# Altium PCB SolarSenseMaster.PcbDoc
Units mm, origin at the board's own origin, x right, y up, seen from the top; angles counter-clockwise.
Board outline 70 x 100 mm, 2 copper layers (Top Layer, Bottom Layer); 62 components, 47 nets, 219 pads, 103 vias.
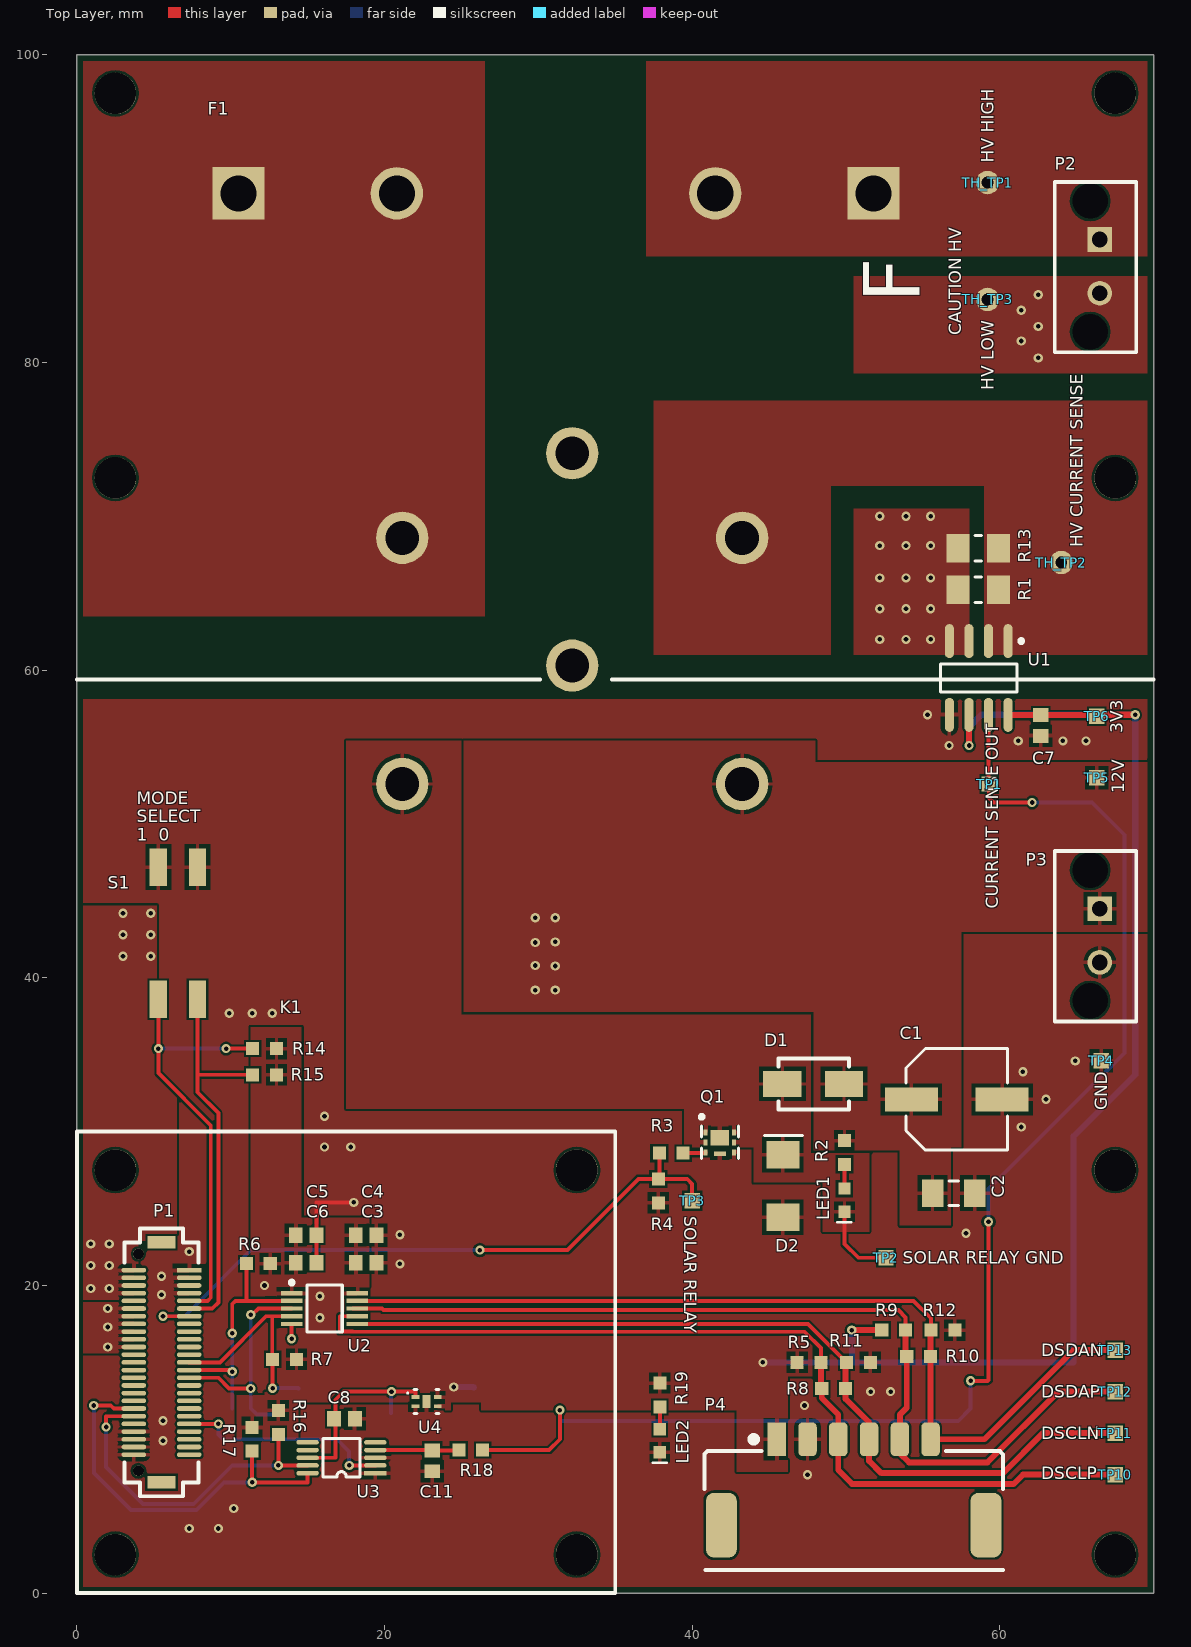
[diagram p0: Top Layer view]
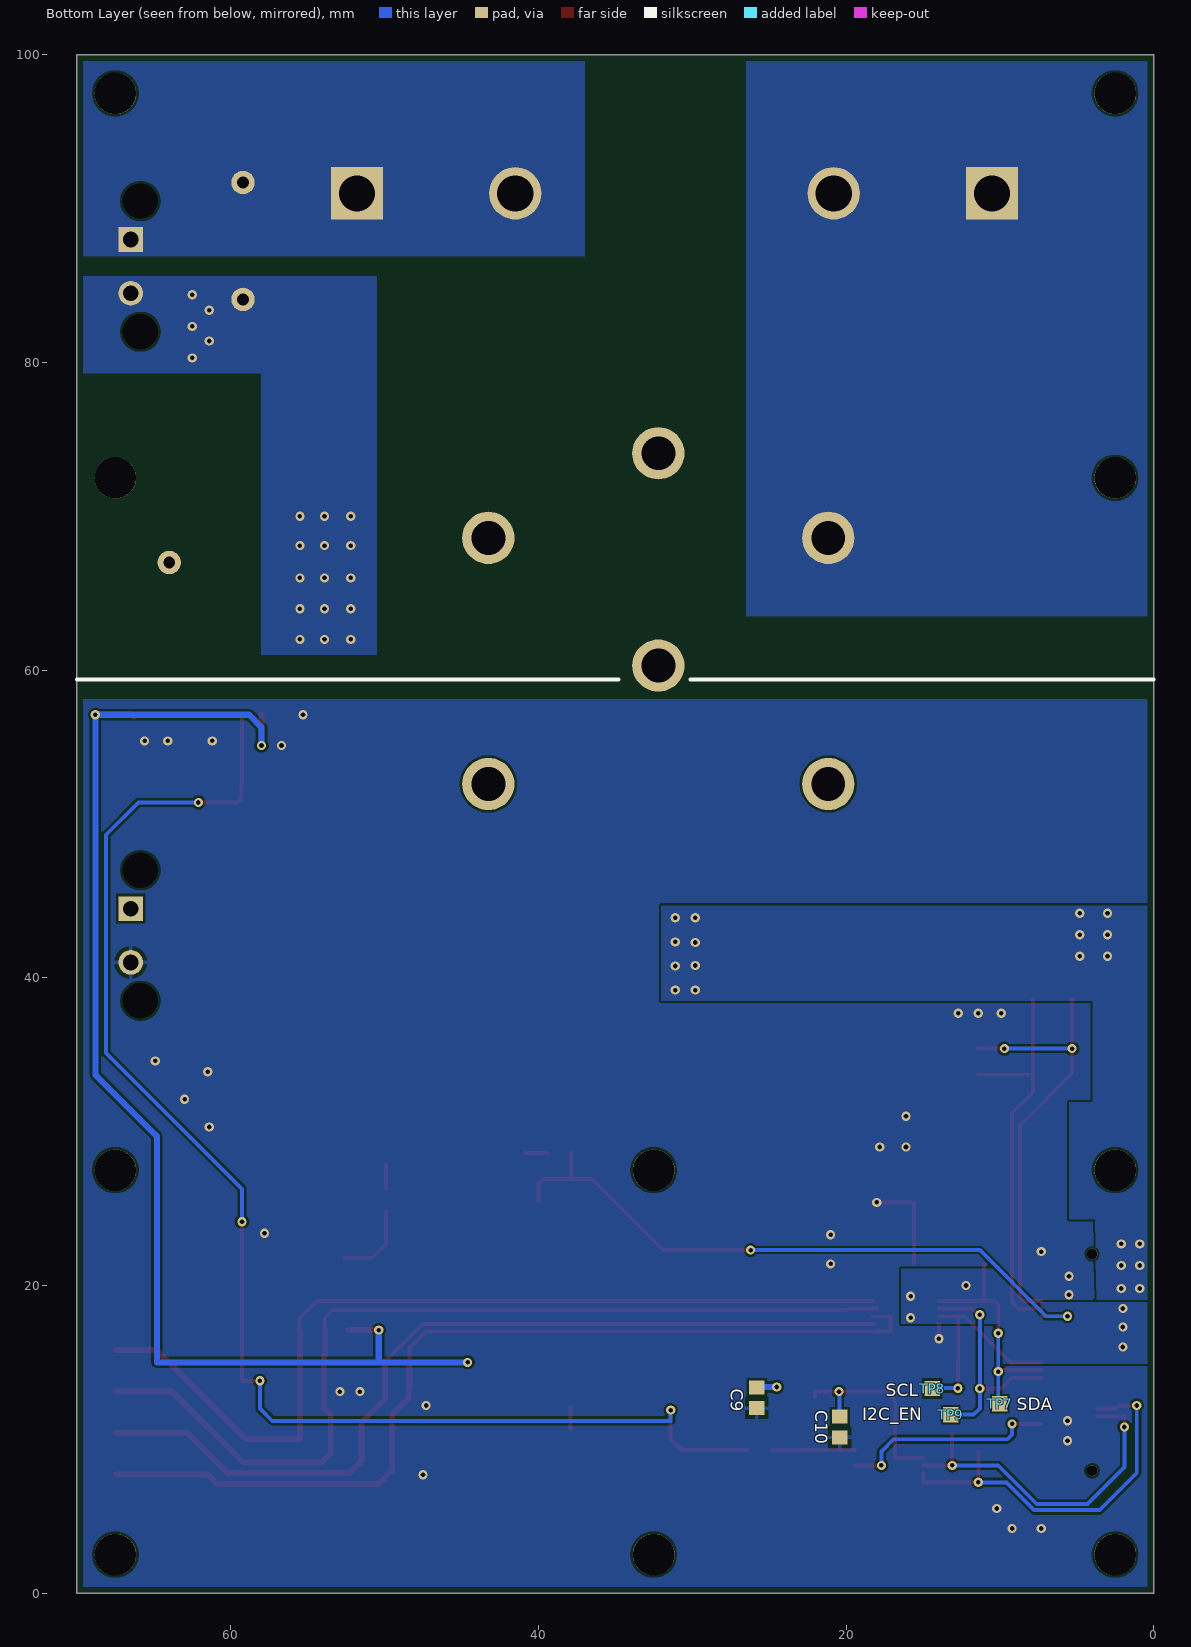
[diagram p1: Bottom Layer view, seen from below]
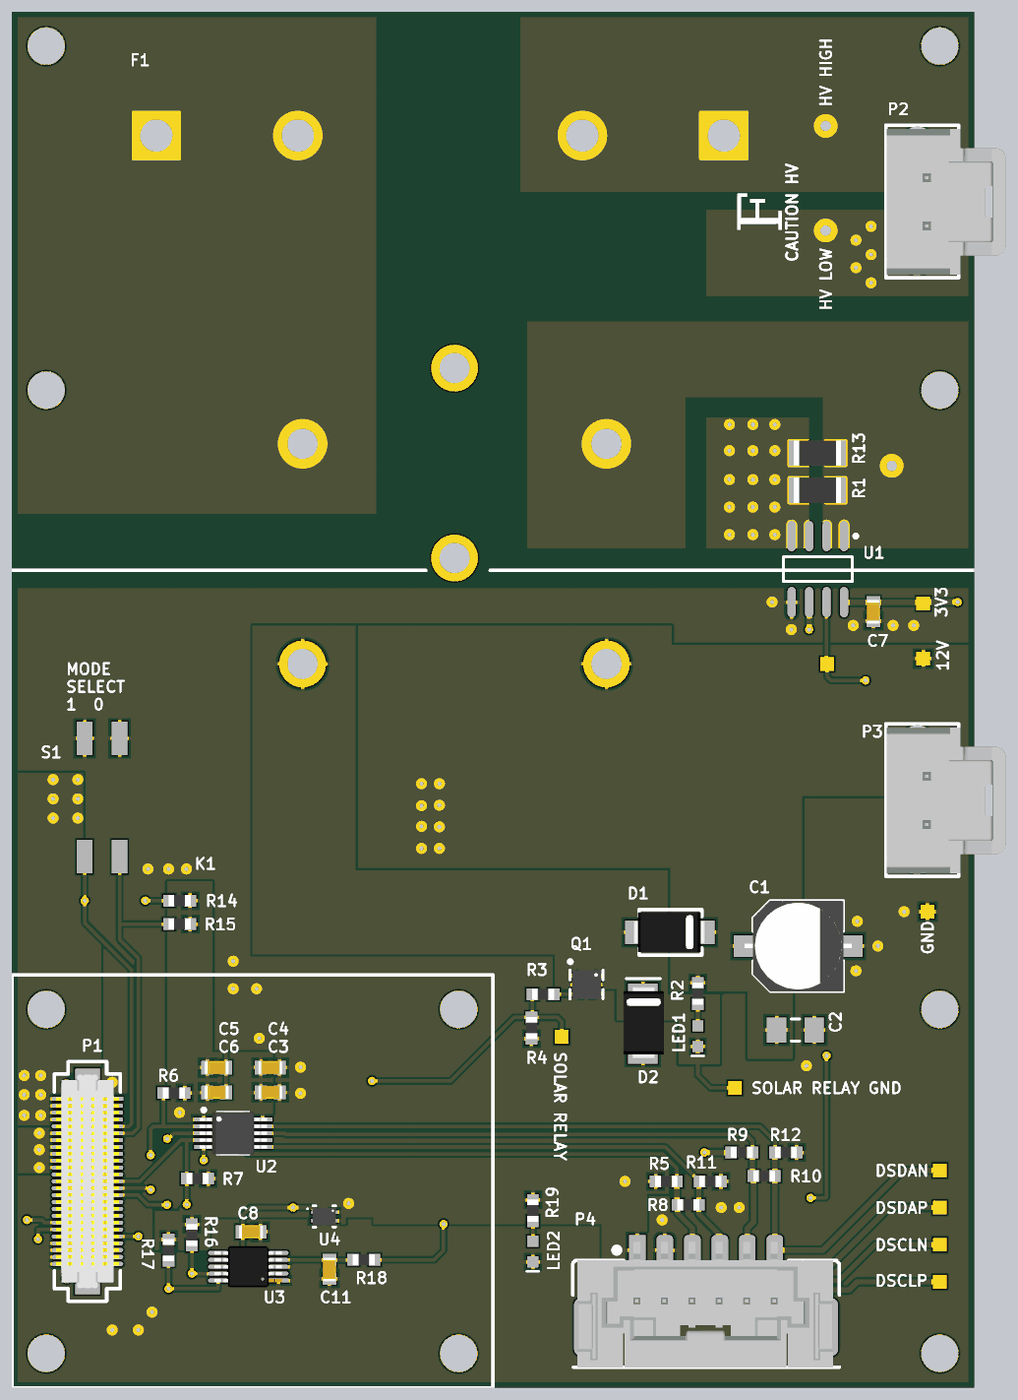
[diagram p2: 3D render of the assembled board from above, using the file's embedded part models]

## Layer stack, top to bottom
Top Solder: solder mask 0.0102, Solder Resist, Dk 3.5
Top Layer: signal copper 0.0356
Dielectric 1: dielectric 0.32, FR-4, Dk 4.8
Bottom Layer: signal copper 0.0356
Bottom Solder: solder mask 0.0102, Solder Resist, Dk 3.5

## Board outline
0,0 0,100 70,100 70,0

## Design rules (kind name [scope] priority, off if disabled: settings)
BoardOutlineClearance [All] p1: gap=0.406 ignorepadtopadclearanceinfootprint=FALSE
Clearance [All] p1: gap=0.152 ignorepadtopadclearanceinfootprint=FALSE except(0: Arc-Hole Track-Hole SMDPad-Hole THPad-Hole Via-Hole Fill-Hole Poly-Hole Region-Hole Text-Hole)
ComponentClearance ComponentClearance_ControllerBoard [InComponent('P1') vs Identifier = 'Controller_Board'] p1: gap=0 collisioncheckmode=3 verticalgap=0 showdistances=FALSE
ComponentClearance ComponentClearance_Standoffs [Identifier = 'Standoff' vs Identifier = 'Controller_Board'] p2: gap=0 collisioncheckmode=3 verticalgap=0 showdistances=FALSE
ComponentClearance [All] p3: gap=0.254 collisioncheckmode=3 verticalgap=0.254 showdistances=FALSE
DiffPairsRouting [All] p1: maxlimit=0.254 minlimit=0.254 mostfreqgap=0.254 toplayer_minwidth=0.254 toplayer_maxwidth=0.381 toplayer_prefwidth=0.254 bottomlayer_minwidth=0.254 bottomlayer_maxwidth=0.381 bottomlayer_prefwidth=0.254 maxuncoupledlength=12.7
Height Relay_Height [InComponent('K1') OR InComponent('K2')] p1: minheight=0 maxheight=70 prefheight=12.7
Height [All] p2: minheight=0 maxheight=25.4 prefheight=12.7
HoleSize [All] p1: absolutevalues=TRUE maxlimit=6.3 minlimit=0.3 maxpercent=80.000 minpercent=20.000
MinimumAnnularRing [All] p1: minimumring=0.15
MinimumSolderMaskSliver [All] p1: minsoldermaskwidth=0.3
PolygonConnect PolygonConnect_10A [All vs InNetClass('10A')] p1: connectstyle=Direct reliefconductorwidth=0.254 reliefentries=4 polygonreliefangle="90 Angle" airgapwidth=0.254
PolygonConnect [IsPad] p2: connectstyle=Relief reliefconductorwidth=0.254 reliefentries=4 polygonreliefangle="90 Angle" airgapwidth=0.254
PolygonConnect PolygonConnect_NoThermal [Not(IsPad)] p3: connectstyle=Direct reliefconductorwidth=0.254 reliefentries=4 polygonreliefangle="90 Angle" airgapwidth=0.254
RoutingVias [All] p1: holewidth=0.3 width=0.6 viastyle="Through Hole" minholewidth=0.3 minwidth=0.6 maxholewidth=0.711 maxwidth=1.27
SilkToSolderMaskClearance [IsPad] p1: minsilkscreentomaskgap=0.178 clearancetoexposedcopper=TRUE
SolderMaskExpansion [All] p1: expansion=0.102
Width Width_3V3 [InNet('3V3')] p1: maxlimit=0.4 minlimit=0.254 preferedwidth=0.4
Width [All] p2: maxlimit=2.54 minlimit=0.152 preferedwidth=0.254
24 further rules are at their usual default settings.

## Classes and differential pairs
component class SolarSenseMaster: C1 C2 C7 D1 D2 F1 K1 LED1 LED2 P2 P3 Q1 R1 R2 R3 R4 R13 R14 R15 R19 S1 TH_TP1 TH_TP2 TH_TP3 TP1 TP2 TP3 TP4 TP5 TP6 U1
component class I2C_Interface: C3 C4 C5 C6 C8 C9 C10 C11 P4 R5 R6 R7 R8 R9 R10 R11 R12 R16 R17 R18 TP7 TP8 TP9 TP10 TP11 TP12 TP13 U2 U3 U4
component class Controller_Board_Interface: P1
net class 10A: HV_HIGH HV_LOW NetF1_2 NetK1_4
differential pair DSCL: +DSCL_P -DSCL_N
differential pair DSDA: +DSDA_P -DSDA_N

## Components (designator, comment, footprint, x,y, rotation, side; value= is the part's Value field where it differs from the comment)
C1 "EEE-1HA4R7NP" "CAP ALUM 6.3MM RADIAL SMD" 57.2,32.1 r0 top
C2 "CAP CER 2.2UF 100V ±20% X7R 1206" "CAP, 1206" 57,26 r0 top
C3 "CAP CER 0.1UF 50V 10% X7R 0603" "CAP, 0603" 18.8,21.469 r0 top
C4 "CAP CER 0.1UF 50V 10% X7R 0603" "CAP, 0603" 18.8,23.274 r0 top
C5 "CAP CER 0.1UF 50V 10% X7R 0603" "CAP, 0603" 14.9,23.274 r0 top
C6 "CAP CER 0.1UF 50V 10% X7R 0603" "CAP, 0603" 14.9,21.469 r0 top
C7 "CAP CER 0.1UF 50V 10% X7R 0603" "CAP, 0603" 62.664,56.4 r270 top
C8 "CAP CER 0.1UF 50V 10% X7R 0603" "CAP, 0603" 17.4,11.329 r0 top
C9 "CAP CER 1UF 50V 10% X7R 0603" "CAP, 0603" 25.8,12.7 r270 bottom
C10 "CAP CER 1UF 50V 10% X7R 0603" "CAP, 0603" 20.4,10.8 r270 bottom
C11 "CAP CER 0.1UF 50V 10% X7R 0603" "CAP, 0603" 23.1,8.6 r270 top
D1 "DIODE SCHOTTKY 60V 3A SMA" "Diode, SMA" 45.869,33.1 r0 top
D2 "DIODE ZENER 16V 5W DO-214AA (SMB)" "DO-214AA Diode" 45.9,24.436 r90 top
F1 "FUSE 12 A 600VAC/DC KLM-12" "FUSE CLIPS 1A3400-09-R" 51.79,91 r180 top
K1 "RELAY SPST 12V 10A" "RELAY SOCKET P7M-06P" 32.2,61.2 r0 top
LED1 "LED YELLOW CLEAR 2.1V 0603" LED_0603 49.89,26.25 r270 top
LED2 "LED GREEN CLEAR 2V 0603" LED_0603 37.89,10.6 r270 top
P1 "CONN 50POS Bergstak Plug 0.02\"" "CONN, BERGSTAK 50 POS PLUG" 5.5,15 r0 top locked
P2 "CONN 2POS ULTRA-FIT 0.138\"" "CONN, 2POS ULTRA-FIT" 66.5,88 r270 top
P3 "CONN 2POS ULTRA-FIT 0.138\"" "CONN, 2POS ULTRA-FIT" 66.5,44.5 r270 top
P4 "DURA-CLIK" "CONN, 6POS DURA-CLIK VERT" 45.5,10 r0 top
Q1 "MOSFET N-CH 30V 8.7A 2.1W 6-PQFN (2x2)" "MOSFET N-CH 30V 12A 2mmx2mm PQFN" 40.875,29.95 r270 top
R1 "RES 0.0 OHM 3/4W 1206" "RES 1206" 58.6,65.221 r180 top
R2 "RES 4.7K OHM 1% 1/10W 0603" "RES, 0603" 49.9,28.65 r270 top
R3 "RES 22.1 OHM 1% 1/10W 0603" "RES, 0603" 38.642,28.6 r0 top
R4 "RES 10K OHM 1% 1/10W 0603" "RES, 0603" 37.8,26.146 r270 top
R5 "RES 604 OHM 1% 1/10W 0603" "RES, 0603" 47.6,15 r0 top
R6 "RES 3.3K OHM 1% 1/4W 0603" "RES, 0603" 11.796,21.419 r180 top
R7 "RES 3.3K OHM 1% 1/4W 0603" "RES, 0603" 13.5,15.2 r180 top
R8 "RES 120 OHM 1% 1/10W 0603" "RES, 0603" 49.2,13.296 r0 top
R9 "RES 604 OHM 1% 1/10W 0603" "RES, 0603" 53.1,17.1 r0 top
R10 "RES 120 OHM 1% 1/10W 0603" "RES, 0603" 54.725,15.396 r0 top
R11 "RES 604 OHM 1% 1/10W 0603" "RES, 0603" 50.804,15 r0 top
R12 "RES 604 OHM 1% 1/10W 0603" "RES, 0603" 56.304,17.1 r0 top
R13 "RES 0.0 OHM 3/4W 1206" "RES 1206" 58.6,67.925 r180 top
R14 "RES 10K OHM 1% 1/10W 0603" "RES, 0603" 12.2,35.4 r180 top
R15 "RES 10K OHM 1% 1/10W 0603" "RES, 0603" 12.2,33.696 r180 top
R16 "RES 4.7K OHM 1% 1/10W 0603" "RES, 0603" 13.1,11.1 r270 top
R17 "RES 4.7K OHM 1% 1/10W 0603" "RES, 0603" 11.396,10 r270 top
R18 "RES 100 OHM 1% 1/10W 0603" "RES, 0603" 25.604,9.3 r180 top
R19 "RES 510 OHM 5% 1/10W 0603" "RES, 0603" 37.9,12.881 r270 top
S1 "SPST" "SW SPST 2POS DIP 0.1A 20V" 5.3,42.9 r0 top
TH_TP1 "HV HIGH" "Thru Test Point" 59.2,91.7 r90 top
TH_TP2 "HV CURRENT SENSE" "Thru Test Point" 64,67 r90 top
TH_TP3 "HV LOW" "Thru Test Point" 59.2,84.1 r90 top
TP1 "CURRENT SENSE OUT" "Test Point" 59.3,52.6 r90 top
TP2 "SOLAR RELAY GND" "Test Point" 52.6,21.8 r90 top
TP3 "SOLAR RELAY" "Test Point" 40,25.5 r90 top
TP4 "GND" "Test Point" 66.6,34.6 r180 top
TP5 "12V" "Test Point" 66.3,53 r0 top
TP6 "3V3" "Test Point" 66.3,57 r90 top
TP7 "SDA" "Test Point" 10,12.3 r90 bottom
TP8 "SCL" "Test Point" 14.4,13.3 r90 bottom
TP9 "I2C_EN" "Test Point" 13.2,11.6 r90 bottom
TP10 "DSCLP" "Test Point" 67.5,7.7 r90 top
TP11 "DSCLN" "Test Point" 67.5,10.4 r90 top
TP12 "DSDAP" "Test Point" 67.5,13.1 r90 top
TP13 "DSDAN" "Test Point" 67.5,15.8 r90 top
U1 "IC CURRENT SENSOR HALL EFFECT 8-SOIC" SOIC8 58.6,59.5 r270 top
U2 "IC DIFFERENTIAL I2C BUFFER PCA9615" TSSOP50P490X110-10N 16.1,18.5 r0 top
U3 "Quad ADC" "IC ADC VSSOP10" 19.4,7.8 r180 top
U4 "MIC94310" "IC REG LDO 3V 0.2A 4-TDFN" 22.014,12.75 r270 top

## Footprints (in the part's own frame and the unit in brackets; to place one, negate y for a bottom-side part, rotate by r counter-clockwise, add the part's x,y. Pads: shape width x height; smd on the part's side, far side on the other; paste and mask are expansions set on the pad)
"CAP ALUM 6.3MM RADIAL SMD" [mm] "Aluminum Electrolytic Capacitor, Body 6.50x6.50x5.50mm, IPC Low Density"
  rect 3.45x1.55 smd: 1(-2.95,0) 2(2.95,0)
  silkscreen extent -3.3,-3.3 3.3,3.3, body extent -3.9,-3.3 3.9,3.3, height 5.5
"CAP, 0603" [mm] "Chip Capacitor, 2-Leads, Body 1.60x0.81mm, IPC Medium Density"
  rect 0.9x1 smd mask+0.076: 1(-0.675,0) 2(0.675,0)
  body extent -0.87,-0.48 0.87,0.48, height 0.9
"CAP, 1206" [mm] "Chip Capacitor, 2-Leads, Body 3.20x1.60mm, IPC Medium Density"
  rect 1.4x1.8 smd: 1(-1.375,0) 2(1.375,0)
  silkscreen extent -0.3,-0.8 0.3,0.8, body extent -1.68,-0.87 1.67,0.87, height 1.8
"CONN, 2POS ULTRA-FIT" [mm] "2 Positions Header, Shrouded Connector 0.138\" (3.50mm) Through Hole Gold"
  rect 1.6x1.6 hole 1.02: 1(0,0)
  round 1.6 hole 1.02: 2(3.5,0)
  round 1.6 hole 2.3: ""(-2.5,-0.63) ""(6,-0.63)
  silkscreen extent -3.74,-2.93 7.33,2.37, body extent -3.48,-2.87 7.12,5.79, height 13.85
"CONN, 6POS DURA-CLIK VERT" [mm]
  rect 1.2x2.2 smd: 1(0,0)
  rrect50% 1.2x2.2 smd: 2(2,0) 3(4,0) 4(6,0) 5(8,0) 6(10,0)
  rrect50% 2x4.2 smd: 7(-3.6,-5.58) 7(13.6,-5.58)
  silkscreen extent -4.7,-8.5 14.7,0.15, body extent -4.35,-8.54 14.25,0.61, height 7.97
"CONN, BERGSTAK 50 POS PLUG" [mm] "Bergstak 50 Position Plug"
  rect 1.6x0.3 smd: 1(1.8,6)
  oval 1.6x0.3 smd: 2(1.8,5.5) 3(1.8,5) 4(1.8,4.5) 5(1.8,4) 6(1.8,3.5) 7(1.8,3) 8(1.8,2.5) 9(1.8,2) 10(1.8,1.5) 11(1.8,1) 12(1.8,0.5) 13(1.8,0) 14(1.8,-0.5) 15(1.8,-1) 16(1.8,-1.5) 17(1.8,-2) 18(1.8,-2.5) 19(1.8,-3) 20(1.8,-3.5) 21(1.8,-4) 22(1.8,-4.5) 23(1.8,-5) 24(1.8,-5.5) 25(1.8,-6) 26(-1.8,-6) 27(-1.8,-5.5) 28(-1.8,-5) 29(-1.8,-4.5) 30(-1.8,-4) 31(-1.8,-3.5) 32(-1.8,-3) 33(-1.8,-2.5) 34(-1.8,-2) 35(-1.8,-1.5) 36(-1.8,-1) 37(-1.8,-0.5) 38(-1.8,0) 39(-1.8,0.5) 40(-1.8,1) 41(-1.8,1.5) 42(-1.8,2) 43(-1.8,2.5) 44(-1.8,3) 45(-1.8,3.5) 46(-1.8,4) 47(-1.8,4.5) 48(-1.8,5) 49(-1.8,5.5) 50(-1.8,6)
  round 0.7 hole 0.7: ""(-1.5,-7.05) ""(-1.5,7.05)
  rect 1.8x0.8 smd: ""(0,-7.8) ""(0,7.8)
  silkscreen extent -2.4,-8.7 2.4,8.7, body extent -2.3,-7.75 2.3,7.75, height 4.2
"Diode, SMA" [mm]
  rect 2.5x1.7 smd: 1(0,0) 2(4,0)
  silkscreen extent -0.25,-1.65 4.32,1.65, body extent -0.69,-1.45 4.59,1.47, height 2.41
"DO-214AA Diode" [mil] "Zener Diode 16V 5W SMBJ5353B-TP"
  rect 70x85 smd: 1(0,0) 2(160,0)
  silkscreen extent 209,-50 209,47, body extent -21,-60 187,55, height 95
"FUSE CLIPS 1A3400-09-R" [mm] "FUSE CLIP CARTRIDGE 20A PCB"
  rect 3.4x3.4 hole 2.35: 1(0,0) 2(41.28,0)
  round 3.4 hole 2.35: 1(10.29,0) 2(30.99,0)
  body extent 0,-6 41.28,6, height 18.03
"IC ADC VSSOP10" [mm]
  rect 1.45x0.3 smd: 1(0,0)
  oval 1.45x0.3 smd: 2(0,-0.5) 3(0,-1) 4(0,-1.5) 5(0,-2) 6(4.4,-2) 7(4.4,-1.5) 8(4.4,-1) 9(4.4,-0.5) 10(4.4,0)
  silkscreen extent 1,-2.25 3.4,0.25, body extent -0.25,-2.5 4.65,0.5, height 1.15
"IC REG LDO 3V 0.2A 4-TDFN" [mm] "QFN, 4-Leads, Body 1.20x1.60mm, Pitch 0.50mm/1.40mm, Thermal Pad 0.86x0.50mm, IPC Medium Density"
  rect 0.25x0.5 smd: 1(0,0) 2(0.6,0) 3(0.6,1.44) 4(0,1.44)
  rect 0.86x0.5 smd: 5(0.3,0.715)
  silkscreen extent -0.48,-0.56 1.07,1.54, body extent -0.33,-0.11 0.92,1.54, height 0.6
LED_0603 [mm]
  rect 0.8x0.8 smd: 1(-0.05,0.01) 2(1.45,0.01)
  silkscreen extent 2.13,-0.46 2.13,0.45, body extent -0.09,-0.39 1.51,0.41, height 0.8
"MOSFET N-CH 30V 12A 2mmx2mm PQFN" [mm] "PQFN, 6-Leads, Body 2.00x2.00mm, Pitch 0.65mm/0.50mm, Thermal Pad 1.00x1.20mm, IPC Medium Density"
  rect 0.4x0.25 smd: 1(0,0) 2(0.65,0) 3(1.3,0) 4(1.3,1.85) 5(0.65,1.85) 6(0,1.85)
  rect 1x1.2 smd: 7(0.35,0.925)
  rect 0.3x0.79 smd: 8(1.39,0.925)
  silkscreen extent -1.14,-0.38 1.7,2.12, body extent -0.4,-0.13 1.7,1.97, height 1
"RELAY SOCKET P7M-06P" [mm]
  round 3.4 hole 2.2: 2(0,12.9) 4(11.05,7.4) 6(-11.05,7.4) 8(0,-0.9) A(11.05,-8.6) B(-11.05,-8.6)
  body extent -19.5,-21.5 19.5,21.5, height 64
"RES 1206" [mm] "Chip Resistor, 2-Leads, Body 3.20x1.60mm, IPC Medium Density"
  rect 1.5x1.85 smd: 1(-1.325,0) 2(1.325,0)
  silkscreen extent -0.2,-0.82 0.2,0.82, body extent -1.73,-0.92 1.73,0.92, height 0.64
"RES, 0603" [mm] "Chip Resistor, 2-Leads, Body 1.60x0.80mm, IPC Medium Density"
  rect 0.85x0.85 smd: 1(-0.775,0) 2(0.775,0)
  body extent -0.8,-0.4 0.8,0.4, height 0.55
SOIC8 [mm]
  oval 2.2x0.6 smd: 1(-2.394,1.935) 2(-2.394,0.665) 3(-2.394,-0.605) 4(-2.394,-1.875) 5(2.406,-1.875) 6(2.406,-0.605) 7(2.406,0.665) 8(2.406,1.935)
  silkscreen extent -2.52,-2.47 0.91,2.91, body extent -1.99,-2.47 2.01,2.53, height 1.75
"SW SPST 2POS DIP 0.1A 20V" [mm] "Dip Switch SPST 2 Position Surface Mount Slide (Standard) Actuator 100mA 20VDC"
  rect 1.13x2.44 smd: 1(0,-4.3) 2(0,4.3) 3(2.54,-4.3) 4(2.54,4.3)
  body extent -2.18,-4.96 4.36,4.96, height 4.4
"Test Point" [mm]
  rect 1x1 smd paste-2: TP(0,0)
"Thru Test Point" [mil]
  round 60 hole 30: TH_TP(0,0)
TSSOP50P490X110-10N [mm] "TSSOP, 10-Leads, Body 3.00x3.00mm, Pitch 0.50mm, IPC Medium Density"
  rect 1.4x0.28 smd: 1(-2.14,1) 2(-2.14,0.5) 3(-2.14,0) 4(-2.14,-0.5) 5(-2.14,-1) 6(2.14,-1) 7(2.14,-0.5) 8(2.14,0) 9(2.14,0.5) 10(2.14,1)
  silkscreen extent -2.26,-1.52 1.15,1.81, body extent -2.45,-1.55 2.45,1.55, height 1.1

## Part data
C1: library part "CAP ALUM 4.7UF 20% 50V SMD", "4.7µF 50V Aluminum Electrolytic Capacitors Radial, Can - SMD 2000 Hrs @ 85°C", Capacitance=4.7uF, Case/Package=Radial, Manufacturer 1=Panasonic, Max Operating Temperature=85°C, Min Operating Temperature=-40°C, Package Quantity=1, Ripple Current=31mA, Supplier Part Number 1=PCE4304CT-ND, Tolerance=20%, Voltage Rating=50V, ComponentLink1Description=https://datasheet.ciiva.com/46374/aba0000ce2-46374373.pdf, ComponentLink1URL=https://datasheet.ciiva.com/46374/aba0000ce2-46374373.pdf, ComponentLink2Description=https://datasheet.ciiva.com/14600/70255710-14600343.pdf, ComponentLink2URL=https://datasheet.ciiva.com/14600/70255710-14600343.pdf, ComponentLink3Description=https://datasheet.ciiva.com/17536/aba0000ce2-17536647.pdf, ComponentLink3URL=https://datasheet.ciiva.com/17536/aba0000ce2-17536647.pdf, ComponentLink4Description=https://datasheet.ciiva.com/24027/aba0000ce2-40801-24027083.pdf, ComponentLink4URL=https://datasheet.ciiva.com/24027/aba0000ce2-40801-24027083.pdf, ComponentLink5Description=https://datasheet.ciiva.com/31414/aba0000ce2-31414684.pdf, ComponentLink5URL=https://datasheet.ciiva.com/31414/aba0000ce2-31414684.pdf, ComponentLink6Description=https://datasheet.ciiva.com/14606/70255710-14606079.pdf, ComponentLink6URL=https://datasheet.ciiva.com/14606/70255710-14606079.pdf, Description 1="CAPACITOR ALUM ELEC, 4.7UF, 50V, 20%, SMD", Diameter=6.3mm, Height=5.4mm, Height - Seated (Max)=0.213inch, Lead Free="Lead Free", Length=5.5mm, Life (Hours)=2000Hour, Manufacturer Part Number 1=EEE-1HA4R7NP, Mount="Surface Mount,PCB", Packaging="Tape and Reel", Pricing 1="1=0.43, 10=0.302, 100=0.1986, 500=0.1471 (USD)", Radiation Hardening=No, REACH SVHC="No SVHC", Ripple Current (AC)=31mA, Stock 1=19771, Supplier 1=Digi-Key, Termination=SMD/SMT, Voltage Rating (DC)=50V, Width=650um
C2: "2.2µF ±20% 100V Ceramic Capacitor X7R 1206 (3216 Metric)", Capacitance=2.2µF, Manufacturer 1="Murata Electronics North America", Manufacturer Part Number 1=GRM31CR72A225MA73L, Operating Temperature="-55°C ~ 125°C", Package / Case="1206 (3216 Metric)", Ratings=-, Supplier Part Number 1=490-12773-1-ND, Temperature Coefficient=X7R, Tolerance=±20%, Voltage=100V, ComponentLink1Description=http://www.murata.com/~/media/webrenewal/support/library/catalog/products/capacitor/mlcc/c02e.ashx, ComponentLink1URL=http://www.murata.com/~/media/webrenewal/support/library/catalog/products/capacitor/mlcc/c02e.ashx, Height - Seated (Max)=-, Lead Spacing=-, Lead Style=-, Mounting Type="Surface Mount, MLCC", Packaging="Cut Tape (CT)", Part Status=Active, Size / Dimension="0.126\" L x 0.063\" W (3.20mm x 1.60mm)", Supplier 1=Digi-Key, Thickness (Max)="0.071\" (1.80mm)"
C3 C4 C5 C6 C7 C8 C11: "0.10µF ±10% 50V Ceramic Capacitor X7R 0603 (1608 Metric)", Capacitance=0.1µF, Manufacturer 1="AVX Corporation", Manufacturer Part Number 1=06035C104KAT2A, Operating Temperature="-55°C ~ 125°C", Package / Case="0603 (1608 Metric)", Ratings=-, Supplier Part Number 1=478-5052-1-ND, Temperature Coefficient=X7R, Tolerance=±10%, Voltage=50V, ComponentLink1Description=http://datasheets.avx.com/X7RDielectric.pdf, ComponentLink1URL=http://datasheets.avx.com/X7RDielectric.pdf, Height - Seated (Max)=-, Lead Spacing=-, Lead Style=-, Mounting Type="Surface Mount, MLCC", Packaging="Cut Tape (CT)", Part Status=Active, Size / Dimension="0.063\" L x 0.032\" W (1.60mm x 0.81mm)", Supplier 1=Digi-Key, Thickness (Max)="0.035\" (0.90mm)"
C9 C10: "1µF ±10% 50V Ceramic Capacitor X7R 0603 (1608 Metric)", Capacitance=1µF, Manufacturer 1="Taiyo Yuden", Manufacturer Part Number 1=UMK107AB7105KA-T, Operating Temperature="-55°C ~ 125°C", Package / Case="0603 (1608 Metric)", Ratings=-, Supplier Part Number 1=587-3247-1-ND, Temperature Coefficient=X7R, Tolerance=±10%, Voltage=50V, ComponentLink1Description=http://www.yuden.co.jp/productdata/catalog/en/mlcc_all_e.pdf, ComponentLink1URL=http://www.yuden.co.jp/productdata/catalog/en/mlcc_all_e.pdf, Height - Seated (Max)=-, Lead Spacing=-, Lead Style=-, Mounting Type="Surface Mount, MLCC", Packaging="Cut Tape (CT)", Part Status=Active, Size / Dimension="0.063\" L x 0.031\" W (1.60mm x 0.80mm)", Supplier 1=Digi-Key, Thickness (Max)="0.037\" (0.95mm)"
D1: "Diode Schottky 60V 3A Surface Mount SMA", Capacitance @ Vr, F="200pF @ 4V, 1MHz", Current - Average Rectified (Io)=3A, Current - Reverse Leakage @ Vr="500µA @ 60V", Manufacturer 1="Diodes Incorporated", Manufacturer Part Number 1=B360A-13-F, Operating Temperature - Junction="-55°C ~ 150°C", Package / Case="DO-214AC, SMA", Supplier Device Package=SMA, Supplier Part Number 1=B360A-FDICT-ND, Voltage - DC Reverse (Vr) (Max)=60V, Voltage - Forward (Vf) (Max) @ If="700mV @ 3A", ComponentLink1Description=https://www.diodes.com/assets/Datasheets/ds30891.pdf, ComponentLink1URL=https://www.diodes.com/assets/Datasheets/ds30891.pdf, Diode Type=Schottky, Mounting Type="Surface Mount", Packaging="Cut Tape (CT)", Part Status=Active, Speed="Fast Recovery =< 500ns, > 200mA (Io)", Supplier 1=Digi-Key
D2: "Zener Diode 16V 5W ±5% Surface Mount DO-214AA (SMB)", Manufacture="Micro Commercial Co", Manufacture Part Number=SMBJ5353B-TP, Power (Max)=5W, Supplier Part Number 1=SMBJ5353B-TPMSCT-ND, Voltage - Forward="1.2V @ 1A", Voltage - Zener (Nom)=16V, Impedence (Max)="2.5 Ohm", Supplier 1=Digi-Key
F1: "FUSE CRTRDGE 12A 600VAC/VDC 5AG", Breaking Capacity @ Rated Voltage="100kA AC, 50kA DC", Current Rating=12A, Manufacturer=Eaton, Manufacturer Part Number=KLM-12, Operating Temperature=-, Package / Case="5AG, 10mm x 38.1mm", Supplier Part Number 1=KLM-12-ND, Applications="Electrical, Industrial", Approvals="CE, CSA, UL", Category="Circuit Protection", Class=-, ComponentLink1Description=http://www.cooperindustries.com/content/dam/public/bussmann/Electrical/Resources/product-datasheets-a/Bus_Ele_DS_2020_KLM.pdf, ComponentLink1URL=http://www.cooperindustries.com/content/dam/public/bussmann/Electrical/Resources/product-datasheets-a/Bus_Ele_DS_2020_KLM.pdf, Features=-, Fuse Type=Cartridge, Mounting Type=Holder, Packaging=Bulk, Part Status=Active, Pricing 1="10=39.155 (CAD)", Response Time=Fast, RoHS="RoHS Compliant", Size / Dimension="0.406\" Dia x 1.500\" L (10.30mm x 38.10mm)", Stock 1=0, Supplier 1=Digi-Key
K1: "General Purpose Relay SPST-NO (1 Form A) 12VDC Coil Socketable", Coil Power="1.5 W", Coil Voltage=12VDC, Manufacturer="Omron Automation and Safety", Manufacturer Part Number="MKS1XT-10 DC12", Operating Temperature="-40°C ~ 60°C", Supplier Part Number 1=Z2956-ND, Switching Voltage="220VDC - Max", Turn Off Voltage (Min)="1.8 VDC", Turn On Voltage (Max)="9.6 VDC", Category=Relays, Coil Type="Non Latching", ComponentLink1Description=http://www.ia.omron.com/data_pdf/cat/mk-s(x)_j175-e1_5_2_csm2141.pdf, ComponentLink1URL=http://www.ia.omron.com/data_pdf/cat/mk-s(x)_j175-e1_5_2_csm2141.pdf, Contact Form="SPST-NO (1 Form A)", Contact Material="Silver Tin Indium (AgSnIn)", Features=-, Mounting Type=Socketable, Packaging=Tray, Part Status=Active, Pricing 1="1=45.24, 10=42.981, 25=40.7192, 50=38.4572, 100=36.1949, 250=33.93272 (CAD)", Relay Type="General Purpose", RoHS="RoHS Compliant", Stock 1=4, Supplier 1=Digi-Key, Termination Style="Plug In"
LED1: "Yellow 590nm LED Indication - Discrete 2V 0603 (1608 Metric)", Color=Yellow, Current - Test=20mA, Lens Color=Colorless, Manufacturer="Wurth Electronics Inc.", Manufacturer Part Number=150060YS75000, Millicandela Rating=120mcd, Package / Case="0603 (1608 Metric)", Supplier Device Package=0603, Supplier Part Number 1=732-4981-1-ND, Voltage - Forward (Vf) (Typ)=2V, Category=Optoelectronics, ComponentLink1Description=http://katalog.we-online.de/led/datasheet/150060YS75000.pdf, ComponentLink1URL=http://katalog.we-online.de/led/datasheet/150060YS75000.pdf, Features=-, Height (Max)=0.80mm, Lens Style/Size="Rectangle with Flat Top, 1.10mm x 0.70mm", Lens Transparency=Clear, Mounting Type="Surface Mount", Packaging="Cut Tape (CT)", Part Status=Active, Pricing 1="1=0.21, 100=0.1617, 500=0.13964 (CAD)", RoHS="RoHS Compliant", Size / Dimension="1.60mm L x 0.80mm W", Stock 1=10523, Supplier 1=Digi-Key, Viewing Angle=140°, Wavelength - Dominant=590nm, Wavelength - Peak=595nm
LED2: "Green 572nm LED Indication - Discrete 2V 0603 (1608 Metric)", Color=Green, Current - Test=20mA, Lens Color=Colorless, Manufacturer="Wurth Electronics Inc.", Manufacturer Part Number=150060VS75000, Millicandela Rating=40mcd, Package / Case="0603 (1608 Metric)", Supplier Device Package=0603, Supplier Part Number 1=732-4980-1-ND, Voltage - Forward (Vf) (Typ)=2V, Category=Optoelectronics, ComponentLink1Description=http://katalog.we-online.de/led/datasheet/150060VS75000.pdf, ComponentLink1URL=http://katalog.we-online.de/led/datasheet/150060VS75000.pdf, Features=-, Height (Max)=0.80mm, Lens Style/Size="Rectangle with Flat Top, 1.10mm x 0.70mm", Lens Transparency=Clear, Mounting Type="Surface Mount", Packaging="Cut Tape (CT)", Part Status=Active, Pricing 1="1=0.21, 100=0.1617, 500=0.13964 (CAD)", RoHS="RoHS Compliant", Size / Dimension="1.60mm L x 0.80mm W", Stock 1=9408, Supplier 1=Digi-Key, Viewing Angle=140°, Wavelength - Dominant=570nm, Wavelength - Peak=572nm
P1: "50 Position Connector Plug, Outer Shroud Contacts Surface Mount Gold", Manufacturer 1="Amphenol FCI", Manufacturer Part Number 1=10132797-055100LF, Supplier Part Number 1=609-5226-1-ND, ComponentLink1Description=http://portal.fciconnect.com/Comergent//fci/drawing/10132797.pdf, ComponentLink1URL=http://portal.fciconnect.com/Comergent//fci/drawing/10132797.pdf, Connector Type="Plug, Outer Shroud Contacts", Contact Finish=Gold, Contact Finish Thickness="1µin (0.025µm)", Height Above Board="0.169\" (4.30mm)", Mated Stacking Heights=5mm, Mounting Type="Surface Mount", Number of Positions=50, Number of Rows=2, Packaging="Cut Tape (CT)", Part Status=Active, Pitch="0.020\" (0.50mm)", Series="BergStak Plug", Supplier 1=Digi-Key
P2 P3: "2 Positions Header, Shrouded Connector 0.138\" (3.50mm) Through Hole Gold", Current Rating=-, Insulation Color=Black, Manufacturer 1="Molex, LLC", Manufacturer Part Number 1=1722861302, Material Flammability Rating="UL94 V-0", Operating Temperature="-40°C ~ 120°C", Supplier Part Number 1=WM11673-ND, Voltage=400V, ComponentLink1Description=http://www.molex.com/pdm_docs/sd/1722861302_sd.pdf, ComponentLink1URL=http://www.molex.com/pdm_docs/sd/1722861302_sd.pdf, Connector Type=Header, Contact Finish - Mating=Gold, Contact Finish - Post=Tin, Contact Finish Thickness - Mating="30µin (0.76µm)", Contact Finish Thickness - Post="60µin (1.52µm)", Contact Length - Mating=-, Contact Length - Post="0.126\" (3.20mm)", Contact Material="Copper Alloy", Contact Shape=Square, Contact Type="Male Pin", Fastening Type="Latch Holder", Ingress Protection=-, Insulation Height="0.465\" (11.80mm)", Insulation Material="Liquid Crystal Polymer (LCP)", Mated Stacking Heights=26.99mm, Mounting Type="Through Hole", Number of Positions=2, Number of Positions Loaded=All, Number of Rows=1, Overall Contact Length=-, Packaging=Tray, Part Status=Active, Pitch - Mating="0.138\" (3.50mm)", Row Spacing - Mating=-, Series=UltraFit, Shrouding="Shrouded - 4 Wall", Style="Board to Board or Cable", Supplier 1=Digi-Key, Termination="Kinked Pin, Solder"
P4: library part "CONN 6POS DURA-CLIK 0.079\"", "6 Positions Header, Shrouded Connector 0.079\" (2.00mm) Surface Mount, Vertical Tin", Current Rating=-, Insulation Color=Natural, Manufacturer=Molex, Manufacturer Part Number=5600200820, Supplier Part Number 1=WM10866CT-ND, Applications="Automotive, Industrial", Category="Connectors, Interconnects", ComponentLink1Description=http://www.molex.com/pdm_docs/sd/5600200220_sd.pdf, ComponentLink1URL=http://www.molex.com/pdm_docs/sd/5600200220_sd.pdf, Connector Type=Header, Contact Finish - Mating=Tin, Contact Finish - Post=Tin, Contact Finish Thickness - Mating=-, Contact Finish Thickness - Post=-, Contact Length - Mating=-, Contact Length - Post=-, Contact Material="Copper Alloy", Contact Shape=Square, Contact Type="Male Pin", Fastening Type="Latch Lock", Features="Solder Retention", Ingress Protection=-, Insulation Height="0.315\" (8.00mm)", Insulation Material="Polyamide (PA), Nylon", Mated Stacking Heights=9.3mm, Material Flammability Rating=-, Mounting Type="Surface Mount", Number of Positions=6, Number of Positions Loaded=All, Number of Rows=1, Operating Temperature=-, Overall Contact Length=-, Packaging="Cut Tape (CT)", Part Status=Active, Pitch - Mating="0.079\" (2.00mm)", Pricing 1="1=1.76, 10=1.542, 25=1.4512, 50=1.391, 100=1.3305, 250=1.20956 (CAD)", RoHS="RoHS Compliant", Row Spacing - Mating=-, Shrouding="Shrouded - 4 Wall", Stock 1=3826, Style="Board to Cable/Wire", Supplier 1=Digi-Key, Termination=Solder, Voltage Rating=-
Q1: Current - Continuous Drain (Id) @ 25°C=8.7A, Drain to Source Voltage (Vdss)=30V, Drive Voltage (Max Rds On,  Min Rds On)="2.5V, 4.5V", Input Capacitance (Ciss) (Max) @ Vds="1019pF @ 25V", Manufacturer 1="Infineon Technologies", Manufacturer Part Number 1=IRLHS6342TRPBF, Operating Temperature="-55°C ~ 150°C (TJ)", Package / Case=6-PowerVDFN, Power Dissipation (Max)=2.1W, Supplier Device Package="6-PQFN (2x2)", Supplier Part Number 1=IRLHS6342TRPBFCT-ND, Category="Discrete Semiconductor Products", ComponentLink1Description=http://www.infineon.com/dgdl/irlhs6342pbf.pdf?fileId=5546d462533600a401535663b52625ad, ComponentLink1URL=http://www.infineon.com/dgdl/irlhs6342pbf.pdf?fileId=5546d462533600a401535663b52625ad, Description 1="MOSFET N-CH 30V 8.7A 2X2 PQFN", FET Feature=-, FET Type=N-Channel, Gate Charge (Qg) (Max) @ Vgs="11nC @ 4.5V", Mounting Type="Surface Mount", Packaging="Cut Tape (CT)", Part Status=Active, Pricing 1="1=0.79, 10=0.685, 100=0.5118, 500=0.4022, 1000=0.31079 (CAD)", Rds On (Max) @ Id, Vgs="15.5 mOhm @ 8.5A, 4.5V", RoHS="RoHS Compliant", Stock 1=9984, Supplier 1=Digi-Key, Technology="MOSFET (Metal Oxide)", Vgs (Max)=±12V, Vgs(th) (Max) @ Id="1.1V @ 10µA"
R1 R13: "0 Ohms Jumper 0.75W, 3/4W Chip Resistor 1206 (3216 Metric) Automotive AEC-Q200 Metal Foil", Manufacturer="Stackpole Electronics Inc.", Manufacturer Part Number=HCJ1206ZT0R00, Operating Temperature="-55°C ~ 155°C", Package / Case="1206 (3216 Metric)", Power (Watts)=3/4W, Resistance=0.0, Supplier Device Package=1206, Supplier Part Number 1=HCJ1206ZT0R00CT-ND, Temperature Coefficient=-, Tolerance=Jumper, Category=Resistors, ComponentLink1Description=https://www.seielect.com/catalog/SEI-HCJ.pdf, ComponentLink1URL=https://www.seielect.com/catalog/SEI-HCJ.pdf, Composition="Metal Foil", Failure Rate=-, Features="Automotive AEC-Q200", Height - Seated (Max)="0.032\" (0.80mm)", Packaging="Cut Tape (CT)", Part Status=Active, Pricing 1="1=0.82, 10=0.583, 25=0.4552, 50=0.3852, 100=0.3034, 250=0.25676, 500=0.21006, 1000=0.16337 (CAD)", RoHS="RoHS Compliant", Size / Dimension="0.122\" L x 0.061\" W (3.10mm x 1.55mm)", Stock 1=1029426, Supplier 1=Digi-Key
R2 R16 R17: "4.7k Ohm ±1% 0.1W, 1/10W Chip Resistor 0603 (1608 Metric) Moisture Resistant Thick Film", Manufacturer 1=Yageo, Manufacturer Part Number 1=RC0603FR-074K7L, Operating Temperature="-55°C ~ 155°C", Package / Case="0603 (1608 Metric)", Power (Watts)=1/10W, Resistance (Ohms)=4.7k, Supplier Device Package=0603, Supplier Part Number 1=311-4.70KHRCT-ND, Temperature Coefficient=±100ppm/°C, Tolerance=±1%, Category=Resistors, ComponentLink1Description=http://www.yageo.com/documents/recent/PYu-RC_Group_51_RoHS_L_7.pdf, ComponentLink1URL=http://www.yageo.com/documents/recent/PYu-RC_Group_51_RoHS_L_7.pdf, Composition="Thick Film", Description 1="RES SMD 4.7K OHM 1% 1/10W 0603", Failure Rate=-, Features="Moisture Resistant", Height - Seated (Max)="0.022\" (0.55mm)", Packaging="Cut Tape (CT)", Part Status=Active, Pricing 1="1=0.16, 10=0.022, 100=0.0089, 1000=0.00402, 2500=0.00349 (CAD)", RoHS="RoHS Compliant", Size / Dimension="0.063\" L x 0.031\" W (1.60mm x 0.80mm)", Stock 1=3487566, Supplier 1=Digi-Key
R3: "22.1 Ohm ±1% 0.1W, 1/10W Chip Resistor 0603 (1608 Metric) Moisture Resistant Thick Film", Manufacturer 1=Yageo, Manufacturer Part Number 1=RC0603FR-0722R1L, Operating Temperature="-55°C ~ 155°C", Package / Case="0603 (1608 Metric)", Power=1/10W, Resistance=22.1, Supplier Device Package=0603, Supplier Part Number 1=311-22.1HRCT-ND, Temperature Coefficient=±100ppm/°C, Tolerance=±1%, ComponentLink1Description=http://www.yageo.com/documents/recent/PYu-RC_Group_51_RoHS_L_7.pdf, ComponentLink1URL=http://www.yageo.com/documents/recent/PYu-RC_Group_51_RoHS_L_7.pdf, Composition="Thick Film", Failure Rate=-, Height - Seated (Max)="0.022\" (0.55mm)", Packaging="Cut Tape (CT)", Part Status=Active, Size / Dimension="0.063\" L x 0.031\" W (1.60mm x 0.80mm)", Supplier 1=Digi-Key
R4 R14 R15: "RES SMD 10K OHM 1% 1/10W 0603", Manufacturer 1=Yageo, Manufacturer Part Number 1=RC0603FR-0710KL, Operating Temperature="-55°C ~ 155°C", Package / Case="0603 (1608 Metric)", Power=1/10W, Resistance=10k, Supplier Device Package=0603, Supplier Part Number 1=311-10.0KHRCT-ND, Temperature Coefficient=±100ppm/°C, Tolerance=±1%, ComponentLink1Description=http://www.yageo.com/documents/recent/PYu-RC_Group_51_RoHS_L_7.pdf, ComponentLink1URL=http://www.yageo.com/documents/recent/PYu-RC_Group_51_RoHS_L_7.pdf, Composition="Thick Film", Failure Rate=-, Height - Seated (Max)="0.022\" (0.55mm)", Packaging="Cut Tape (CT)", Part Status=Active, Size / Dimension="0.063\" L x 0.031\" W (1.60mm x 0.80mm)", Supplier 1=Digi-Key
R5 R9 R11 R12: "RES SMD 604 OHM 1% 1/10W 0603", Manufacturer 1=Yageo, Manufacturer Part Number 1=RC0603FR-07604RL, Operating Temperature="-55°C ~ 155°C", Package / Case="0603 (1608 Metric)", Power=1/10W, Resistance=604, Supplier Device Package=0603, Supplier Part Number 1=311-604HRCT-ND, Temperature Coefficient=±100ppm/°C, Tolerance=±1%, ComponentLink1Description=http://www.yageo.com/documents/recent/PYu-RC_Group_51_RoHS_L_7.pdf, ComponentLink1URL=http://www.yageo.com/documents/recent/PYu-RC_Group_51_RoHS_L_7.pdf, Composition="Thick Film", Failure Rate=-, Height - Seated (Max)="0.022\" (0.55mm)", Packaging="Cut Tape (CT)", Part Status=Active, Size / Dimension="0.063\" L x 0.031\" W (1.60mm x 0.80mm)", Supplier 1=Digi-Key
R6 R7: "3.3k Ohm ±1% 0.25W, 1/4W Chip Resistor 0603 (1608 Metric) Automotive AEC-Q200, Pulse Withstanding Thick Film", Manufacturer 1="Panasonic Electronic Components", Manufacturer Part Number 1=ERJ-PA3F3301V, Operating Temperature="-55°C ~ 155°C", Package / Case="0603 (1608 Metric)", Power=1/4W, Resistance=3.3k, Supplier Device Package=0603, Supplier Part Number 1=P3.3KBYCT-ND, Temperature Coefficient=±100ppm/°C, Tolerance=±1%, ComponentLink1Description=https://industrial.panasonic.com/cdbs/www-data/pdf/RDO0000/AOA0000C291.pdf, ComponentLink1URL=https://industrial.panasonic.com/cdbs/www-data/pdf/RDO0000/AOA0000C291.pdf, Composition="Thick Film", Failure Rate=-, Height - Seated (Max)="0.022\" (0.55mm)", Packaging="Cut Tape (CT)", Part Status=Active, Size / Dimension="0.063\" L x 0.031\" W (1.60mm x 0.80mm)", Supplier 1=Digi-Key
R8 R10: "RES SMD 120 OHM 1% 1/10W 0603", Manufacturer 1=Yageo, Manufacturer Part Number 1=RC0603FR-07120RL, Operating Temperature="-55°C ~ 155°C", Package / Case="0603 (1608 Metric)", Power=1/10W, Resistance=120, Supplier Device Package=0603, Supplier Part Number 1=311-120HRCT-ND, Temperature Coefficient=±100ppm/°C, Tolerance=±1%, ComponentLink1Description=http://www.yageo.com/documents/recent/PYu-RC_Group_51_RoHS_L_7.pdf, ComponentLink1URL=http://www.yageo.com/documents/recent/PYu-RC_Group_51_RoHS_L_7.pdf, Composition="Thick Film", Failure Rate=-, Height - Seated (Max)="0.022\" (0.55mm)", Packaging="Cut Tape (CT)", Part Status=Active, Size / Dimension="0.063\" L x 0.031\" W (1.60mm x 0.80mm)", Supplier 1=Digi-Key
R18: "100 Ohm ±1% 0.1W, 1/10W Chip Resistor 0603 (1608 Metric) Moisture Resistant Thick Film", Manufacturer 1=Yageo, Manufacturer Part Number 1=RC0603FR-07100RL, Operating Temperature="-55°C ~ 155°C", Package / Case="0603 (1608 Metric)", Power=1/10W, Resistance=100, Supplier Device Package=0603, Supplier Part Number 1=311-100HRCT-ND, Temperature Coefficient=±100ppm/°C, Tolerance=±1%, ComponentLink1Description=http://www.yageo.com/documents/recent/PYu-RC_Group_51_RoHS_L_7.pdf, ComponentLink1URL=http://www.yageo.com/documents/recent/PYu-RC_Group_51_RoHS_L_7.pdf, Composition="Thick Film", Failure Rate=-, Height - Seated (Max)="0.022\" (0.55mm)", Packaging="Cut Tape (CT)", Part Status=Active, Size / Dimension="0.063\" L x 0.031\" W (1.60mm x 0.80mm)", Supplier 1=Digi-Key
R19: "RES SMD 510 OHM 5% 1/10W 0603", Manufacturer 1=Yageo, Manufacturer Part Number 1=RC0603JR-07510RL, Operating Temperature="-55°C ~ 155°C", Package / Case="0603 (1608 Metric)", Power=1/10W, Resistance=510, Supplier Device Package=0603, Supplier Part Number 1=311-510GRCT-ND, Temperature Coefficient=±100ppm/°C, Tolerance=±5%, ComponentLink1Description=http://www.yageo.com/documents/recent/PYu-RC_Group_51_RoHS_L_7.pdf, ComponentLink1URL=http://www.yageo.com/documents/recent/PYu-RC_Group_51_RoHS_L_7.pdf, Composition="Thick Film", Failure Rate=-, Height - Seated (Max)="0.022\" (0.55mm)", Packaging="Cut Tape (CT)", Part Status=Active, Size / Dimension="0.063\" L x 0.031\" W (1.60mm x 0.80mm)", Supplier 1=Digi-Key
S1: library part "SW SPST 2POS DIP 0.1A 20V", "SWITCH SLIDE DIP SPST 100MA 20V", Current Rating=100mA, Manufacturer="CTS Electrocomponents", Manufacturer Part Number=219-2MST, Operating Temperature="-55°C ~ 85°C", Supplier Part Number 1=CT2192MST-ND, Voltage Rating=20VDC, Actuator Level=Raised, Actuator Type="Slide (Standard)", Body Material=-, Category=Switches, Circuit=SPST, ComponentLink1Description=https://www.ctscorp.com/wp-content/uploads/219.pdf, ComponentLink1URL=https://www.ctscorp.com/wp-content/uploads/219.pdf, Contact Finish=Gold, Contact Material="Beryllium Copper", Electrical Life="2,000 Cycles", Features="Epoxy Sealed Terminals, Tape Seal", Height Above Board="0.170\" (4.33mm)", Length="0.258\" (6.55mm)", Mechanical Life=-, Mounting Type="Surface Mount", Packaging=Tube, Part Status=Active, Pitch="0.100\" (2.54mm), Full", Pricing 1="1=0.84, 10=0.818, 25=0.7708, 50=0.7234, 100=0.6921, 250=0.66056, 500=0.59762, 1000=0.55044, 5000=0.44822 (CAD)", RoHS="RoHS Compliant", Stock 1=444, Supplier 1=Digi-Key, Termination Style="Gull Wing", Washable=Yes
TH_TP1 TH_TP2 TH_TP3: library part "Thru Test Point"
TP1 TP2 TP3 TP4 TP5 TP6 TP7 TP8 TP9 TP10 TP11 TP12 TP13: library part "Test Point"
U1: "Current Sensor 10A 1 Channel Hall Effect, Open Loop Unidirectional 8-SOIC (0.154\", 3.90mm Width)", Current - Sensing=10A, Current - Supply (Max)=12mA, Frequency="DC ~ 80kHz", Manufacturer="Allegro MicroSystems, LLC", Manufacturer Part Number=ACS722LLCTR-10AU-T, Operating Temperature="-40°C ~ 150°C", Package / Case="8-SOIC (0.154\", 3.90mm Width)", Supplier Part Number 1=620-1636-1-ND, Voltage - Supply="3 V ~ 3.6 V", Accuracy=±3%, Category="Sensors, Transducers", ComponentLink1Description=http://www.allegromicro.com/~/media/Files/Datasheets/ACS722-Datasheet.ashx, ComponentLink1URL=http://www.allegromicro.com/~/media/Files/Datasheets/ACS722-Datasheet.ashx, For Measuring=DC, Linearity=±1%, Mounting Type="Surface Mount", Output="Ratiometric, Voltage", Packaging="Cut Tape (CT)", Part Status=Active, Polarization=Unidirectional, Pricing 1="1=8.22, 5=7.25, 10=6.404, 25=5.1948, 50=4.5908, 100=4.4701, 500=3.74526, 1000=3.50362 (CAD)", Response Time=5µs, RoHS="RoHS Compliant", Sensitivity=264mV/A, Sensor Type="Hall Effect, Open Loop", Stock 1=5711, Supplier 1=Digi-Key
U2: "Buffer, ReDriver 2 Channel 400kHz 10-TSSOP", Base Part Number=PCA9615, Current - Supply=16µA, Manufacturer="NXP USA Inc.", Manufacturer Part Number=PCA9615DPJ, Operating Temperature="-40°C ~ 85°C", Package / Case="10-TFSOP, 10-MSOP (0.118\", 3.00mm Width)", Supplier Device Package=10-TSSOP, Supplier Part Number 1=568-11484-1-ND, Voltage - Supply="2.3 V ~ 5.5 V", Applications=I²C, Category="Integrated Circuits (ICs)", ComponentLink1Description=http://www.nxp.com/documents/data_sheet/PCA9615.pdf, ComponentLink1URL=http://www.nxp.com/documents/data_sheet/PCA9615.pdf, Data Rate (Max)=400kHz, Delay Time=-, Input="2-Wire Bus", Number of Channels=2, Output="2-Wire Bus", Packaging="Cut Tape (CT)", Part Status=Active, Pricing 1="1=4.38, 10=3.93, 100=3.2205, 500=2.74156, 1000=2.31216 (CAD)", RoHS="RoHS Compliant", Signal Conditioning=-, Stock 1=7673, Supplier 1=Digi-Key, Type="Buffer, ReDriver"
U3: library part "IC ADC 12-BIT VSSOP-10", "12 Bit Analog to Digital Converter 4 Input 1 Sigma-Delta 10-VSSOP", Manufacturer="Texas Instruments", Manufacturer Part Number=ADS1015IDGSR, Operating Temperature="-40°C ~ 125°C", Package / Case="10-TFSOP, 10-MSOP (0.118\", 3.00mm Width)", Supplier Device Package=10-VSSOP, Supplier Part Number 1=296-41185-1-ND, Voltage - Supply, Analog="2 V ~ 5.5 V", Architecture=Sigma-Delta, Category="Integrated Circuits (ICs)", ComponentLink1Description=http://www.ti.com/lit/ds/symlink/ads1013.pdf, ComponentLink1URL=http://www.ti.com/lit/ds/symlink/ads1013.pdf, Configuration=MUX-PGA-ADC, Data Interface=I²C, Features="PGA, Selectable Address", Input Type="Differential, Single Ended", Number of A/D Converters=1, Number of Bits=12, Number of Inputs="2, 4", Packaging="Cut Tape (CT)", Part Status=Active, Pricing 1="1=4.25, 10=3.807, 100=3.1194, 500=2.65552, 1000=2.23959 (CAD)", Ratio - S/H:ADC=-, Reference Type=Internal, RoHS="RoHS Compliant", Sampling Rate (Per Second)=3.3k, Stock 1=4084, Supplier 1=Digi-Key, Voltage - Supply, Digital="2 V ~ 5.5 V"
U4: library part "IC REG LDO 3V 0.2A 4-TDFN", Current - Limit (Min)=250mA, Current - Output=200mA, Manufacturer="Microchip Technology", Manufacturer Part Number=MIC94310-PYMT-TR, Operating Temperature="-40°C ~ 125°C", Package / Case="4-UFDFN Exposed Pad", Supplier Device Package="4-TDFN (1.2x1.6)", Supplier Part Number 1=576-4761-1-ND, Voltage - Dropout (Typical)="0.04V @ 200mA", Voltage - Input="Up to 3.6V", Voltage - Output=3V, Category="Integrated Circuits (ICs)", ComponentLink1Description=http://www.microchip.com/mymicrochip/filehandler.aspx?ddocname=en580409, ComponentLink1URL=http://www.microchip.com/mymicrochip/filehandler.aspx?ddocname=en580409, Mounting Type="Surface Mount", Packaging="Cut Tape (CT)", Part Status=Active, Pricing 1="1=0.45, 25=0.3708, 100=0.3386 (CAD)", Regulator Topology="Positive Fixed", RoHS="RoHS Compliant", Stock 1=4802, Supplier 1=Digi-Key

## Free pads (board coordinates)
  round 2.7 hole 2.7: ""(2.5,2.5) ""(2.5,27.5) ""(2.5,72.5) ""(2.5,97.5) ""(32.5,2.5) ""(32.5,27.5) ""(67.5,97.5) ""(67.5,2.5) ""(67.5,27.5) ""(67.5,72.5)

## Via types
v1: diameter 0.6, hole 0.3, Top Layer to Bottom Layer, 103 vias

## Nets (pads, with @x,y where several pads share a name; then routed paths per layer and width w, separated by ;. In a path a pad name is that pad's centre, name@x,y a point inside that pad or via, vN(x,y) a via of type N, cw(c..) or ccw(c..) an arc to the next point about the centre after c; other vN are vias at no path point)
3V0: C8.1 C10.1 U3.8 U4.1 | length 12.7
  Top Layer w0.254: U3.8 16.8,8.8 16.8,12.572 17.328,13.1 v1(20.454,13.1) 22.014,13.1 U4.1
  Bottom Layer w0.254: C10.1@20.427,11.721 20.427,13.073 v1(20.454,13.1)
3V3: C3.1 C4.1 C5.1 C6.1 C7.1 C9.1 P1.40 P1.41 P1.42 P1.43 P1.44 P1.45 P4.1 R5.1 R6.1 R7.1 R9.1 R14.1 R15.1 R16.1 R17.1 R19.1 TP6.TP U1.6 U1.8 U2.1 U2.10 U4.3 U4.4 | length 92
  Top Layer w0.4: v1(50.379,17.1) R9.1 ; U1.6 58,57.089 v1(58,55.1) ; U1.8 60.554,57.075 C7.1 66.225,57.075 TP6.TP 66.4,57.1 v1(68.8,57.1)
  Bottom Layer w0.4: v1(24.5,13.4) 25.775,13.4 C9.1 ; v1(44.6,15) 50.379,15 v1(50.379,17.1) ; 50.404,15 64.8,15 64.8,29.7 68.8,33.7 v1(68.8,57.1) 58.8,57.1 58,56.3 v1(58,55.1)
  other v1: 2,16 2,17.3 15.8,17.9 2,18.5 15.8,19.3 12.2,20
12V: C1.1 C2.1 D1.2 K1.A P1.47 P1.48 P1.49 P1.50 P3.1 R2.1 TP5.TP
  other v1: 0.9,19.8 2.1,19.8 0.9,21.3 2.1,21.3 0.9,22.7 2.1,22.7 29.8,39.2 31.1,39.2 31.1,40.767 29.8,40.8 3,41.4 4.8,41.4 29.8,42.3 31.1,42.333 3,42.8 4.8,42.8 29.8,43.9 31.1,43.9 3,44.2 4.8,44.2
DSCL_N: P4.4 R8.2 R11.1 TP11.TP U2.6 | length 57.4
  Top Layer w0.254: U2.6@18.14,17.5 U2.6 47.518,17.5 49.891,15.127 49.902,15.127 R11.1
  Top Layer w0.381: R11.1 49.975,14.946 R8.2 49.975,12.625 51.5,11.1 P4.4 51.5,8.6 52.3,7.8 60.2,7.8 62.8,10.4 TP11.TP
DSCL_P: P4.3 R5.2 R8.1 TP10.TP U2.7 | length 60.9
  Top Layer w0.254: U2.7 17.1,18 17.1,17 17.922,17 17.93,16.992 47.308,16.992 48.375,15.925 R5.2
  Top Layer w0.381: R5.2 48.375,13.346 R8.1 48.425,12.68 49.5,11.605 P4.3 49.5,8 50.4,7.1 60.9,7.1 61.5,7.7 TP10.TP
DSDA_N: P4.6 R10.2 R12.1 TP13.TP U2.9 | length 60
  Top Layer w0.254: U2.9 54.4,19 55.529,17.871 R12.1
  Top Layer w0.381: R12.1 55.5,17.071 R10.2 P4.6 59,10 64.8,15.8 TP13.TP
DSDA_P: P4.5 R9.2 R10.1 TP12.TP U2.8 | length 61.4
  Top Layer w0.254: U2.8@17.94,18.5 U2.8 19.825,18.5 19.925,18.4 53.4,18.4 53.875,17.925 R9.2
  Top Layer w0.381: R9.2 53.875,15.471 R10.1 53.95,12.05 53.5,11.6 P4.5 53.5,9.1 54.1,8.5 59.2,8.5 63.8,13.1 TP12.TP
GND: C1.2 C2.2 C3.2 C4.2 C5.2 C6.2 C7.2 C8.2 C9.2 C10.2 C11.2 D2.1 LED2.2 P1.1 P1.2 P1.3 P1.4 P1.26 P1.27 P1.28 P1.29 P3.2 P4.2 Q1.4 Q1.8 R4.2 R11.2 R12.2 S1.2 S1.4 TP4.TP U1.5 U2.5 U3.1 U3.3 U4.2 U4.5 | length 7.3
  Top Layer w0.254: v1(13.96,16.54) U2.5 ; C6.2 C5.2 15.575,25.4 v1(18,25.4)
  other v1: 7.3,4.2 9.2,4.2 10.2,5.5 47.5,7.7 5.6,9.9 5.6,11.2 47.3,12.2 51.6,13.1 52.9,13.1 5.5,19.4 5.5,20.6 21,21.4 7.3,22.2 21,23.3 57.8,23.4 16.1,29 17.8,29 61.4,30.3 16.1,31 63,32.1 61.5,33.9 64.9,34.6 9.9,37.7 11.4,37.7 12.7,37.7 56.7,55.1 61.2,55.4 64.1,55.4 65.6,55.4 55.3,57.1
HV_HIGH: F1.1 P2.1 TH_TP1.TH_TP
HV_LOW: P2.2 R1.2 R13.2 TH_TP3.TH_TP U1.3 U1.4
  other v1: 52.2,62 53.9,62 55.5,62 52.2,64 53.9,64 55.5,64 52.2,66 53.9,66 55.5,66 52.2,68.1 53.9,68.1 55.5,68.1 52.2,70 53.9,70 55.5,70 62.5,80.3 61.4,81.4 62.5,82.35 61.4,83.4 62.5,84.4
NetC11_1: C11.1 R18.2 U3.4 | length 5.4
  Top Layer w0.254: U3.4 23.075,9.3 C11.1 24.804,9.275 R18.2
NetF1_2: F1.2 K1.6
NetK1_4: K1.4 R1.1 R13.1 TH_TP2.TH_TP U1.1 U1.2
NetLED1_1: LED1.1 R2.2 | length 1.6
  Top Layer w0.254: LED1.1 R2.2
NetLED2_1: LED2.1 R19.2 | length 1.5
  Top Layer w0.254: LED2.1 R19.2
NetQ1_3: Q1.3 R3.2 | length 1.5
  Top Layer w0.254: R3.2 40.825,28.6 Q1.3
NetR18_1: R18.1 TP1.TP U1.7 | length 92.2
  Top Layer w0.254: R18.1@26.404,9.3 30.7,9.3 31.4,10 v1(31.4,11.9) ; v1(58.1,13.8) 59.2,13.8 59.265,13.865 v1(59.265,24.135) ; U1.7 59.265,52.635 TP1.TP 59.3,51.7 59.6,51.4 v1(62.1,51.4)
  Bottom Layer w0.254: v1(31.4,11.9) 31.4,11.2 57.3,11.2 58.1,12 v1(58.1,13.8) ; v1(59.265,24.135) 59.265,26.265 68.1,35.1 68.1,49.3 66,51.4 v1(62.1,51.4)
PA0/AN0: P1.25
PA1: P1.24
PA2/AN2/USART2_TX: P1.23
PA3/AN3/USART2_RX: P1.22
PA4/ADC_INTERRUPT: P1.21 U3.2 | length 14.2
  Top Layer w0.254: P1.21 v1(9.2,11) ; v1(17.7,8.3) U3.2
  Bottom Layer w0.254: v1(9.2,11) 9.2,10.3 9.5,10 16.9,10 17.7,9.2 v1(17.7,8.3)
PA5: P1.20
PA6/AN6/SPI1_MISO: P1.19
PA7/AN7/SPI1_MOSI: P1.18
PA8/SOLAR_RELAY: P1.7 R3.1 R4.1 TP3.TP | length 42.7
  Top Layer w0.254: v1(5.6,18) P1.7 ; v1(26.2,22.3) 31.9,22.3 36.521,26.921 R4.1 ; R3.1 37.867,26.987 R4.1 ; TP3.TP 40,26.6 39.679,26.921 R4.1
  Bottom Layer w0.254: v1(5.6,18) 7,18 11.3,22.3 v1(26.2,22.3)
PA9/MODE_SEL_0: P1.6 R15.2 S1.3 | length 25.9
  Top Layer w0.254: P1.6 8.8,18.5 9.2,18.9 9.2,31.2 7.84,32.56 7.84,33.7 ; S1.3 7.84,33.7 ; R15.2 7.844,33.696 7.84,33.7
PA10/MODE_SEL_1: P1.5 R14.2 S1.1 | length 28.4
  Top Layer w0.254: S1.1 v1(5.3,35.4) 5.3,33.8 8.7,30.4 8.7,19.2 8.5,19 P1.5 ; v1(9.7,35.4) R14.2
  Bottom Layer w0.254: v1(5.3,35.4) v1(9.7,35.4)
PA15/LED_RED: P1.39
PB0/AN8: P1.17
PB1/AN9: P1.16
PB2/I2C_BUFFER_EN: P1.15 TP9.TP U2.3 | length 15.4
  Top Layer w0.254: P1.15 9.2,14 9.9,13.3 v1(11.3,13.3) ; v1(11.3,18.1) 11.4,18.1 11.8,18.5 U2.3
  Bottom Layer w0.254: v1(11.3,18.1) 11.4,18 11.3,17.9 v1(11.3,13.3) 11.3,12 11.7,11.6 TP9.TP
PB3/LED_GREEN: P1.38
PB4/LED_BLUE: P1.37
PB5/LED_BLUE: P1.36
PB6/USART1_TX: P1.34
PB7/USART1_RX: P1.33
PB8/I2C1_SCL: P1.32 R17.2 U3.10 | length 25.4
  Top Layer w0.254: v1(1.1,12.2) 2.2,12.2 2.4,12 P1.32 ; R17.2 11.396,7.204 v1(11.4,7.2) 15,7.2 U3.10
  Bottom Layer w0.254: v1(1.1,12.2) 1.1,7.8 3.506,5.394 7.768,5.394 9.575,7.2 v1(11.4,7.2)
PB9/I2C1_SDA: P1.31 R16.2 U3.9 | length 22.3
  Top Layer w0.254: v1(1.9,10.8) 1.9,11.5 P1.31 ; R16.2 v1(13.1,8.3) U3.9
  Bottom Layer w0.254: v1(1.9,10.8) 1.9,8.2 4.3,5.8 7.6,5.8 10.1,8.3 v1(13.1,8.3)
PB10/I2C2_SCL: P1.14 R6.2 TP7.TP U2.2 | length 16
  Top Layer w0.254: P1.14 10,14.5 v1(10.1,14.4) ; v1(10.1,16.9) 10.1,18.8 10.3,19 11,19 ; R6.2 11.021,19.021 11,19 ; U2.2 11,19
  Bottom Layer w0.254: TP7.TP@10.1,12 v1(10.1,14.4) v1(10.1,16.9)
PB11/I2C2_SDA: P1.13 R7.2 TP8.TP U2.4 | length 14.2
  Top Layer w0.254: P1.13 9.3,15 12.3,18 12.7,18 ; R7.2@12.7,15.3 12.7,18 ; v1(12.725,13.325) R7.2 ; U2.4 12.7,18
  Bottom Layer w0.254: v1(12.725,13.325) 14.375,13.325 TP8.TP
PB12/SPI2_NSS: P1.11
PB13/SPI2_SCK: P1.10
PB14/SPI2_MISO: P1.9
PB15/SPI2_MOSI: P1.8
PC13: P1.30
SOLAR_RELAY_GND: D1.1 D2.2 K1.B LED1.2 Q1.1 Q1.2 Q1.5 Q1.6 Q1.7 TP2.TP | length 5.2
  Top Layer w0.254: LED1.2 49.9,22.7 50.8,21.8 TP2.TP
pads on no net: K1.2 K1.8 P1. P1.12 P1.35 P1.46 P2. P3. P4.7 U3.5 U3.6 U3.7

## Polygon pours and split planes (outlines as drawn)
GND on Top Layer "GND_L01_P092" (solid, pour order 92): 70,0 0,0 0,58.1 70,58.1
3V3 on Top Layer "3V3_L01_P086" (solid, pour order 86): 12.2,12.864 10.4,12.864 10.4,10 14.4,10 14.4,12.4 19,12.4 22.679,12.4 22.729,12.45 22.729,11.9 24.3,11.9 24.3,12.4 26.3,12.4 26.3,11.9 42.9,11.9 42.9,7.9 46.2,7.9 46.2,14.1 47.8,14.1 47.8,16.7 17.9,16.7 17.9,19.2 19,19.2 19,24.4 14.6,24.4 14.6,36.8 11.3,36.8 11.3,19.3 12.2,19.3
NetF1_2 on Top Layer "NETF1_2_L01_P091" (solid, pour order 91): 26.5,100 26.5,63.5 0,63.5 0,100
HV_HIGH on Top Layer "HV_HIGH_L01_P089" (solid, pour order 89): 37,100 37,86.9 70,86.9 70,100
HV_LOW on Top Layer "HV_LOW_L01_P083" (solid, pour order 83): 58,61 50.5,61 50.5,70.5 58,70.5
NetK1_4 on Top Layer "NETK1_4_L01_P088" (solid, pour order 88): 59,61 70,61 70,77.5 37.5,77.5 37.5,61 49,61 49,72 59,72
HV_LOW on Top Layer "HV_LOW_L01_P084" (solid, pour order 84): 70,79.3 50.5,79.3 50.5,85.6 70,85.6
SOLAR_RELAY_GND on Top Layer "SOLAR_RELAY_GND_L01_P087" (solid, pour order 87): 48.5,26.7 48.5,23.5 51.5,23.5 51.5,28.6 47.7,28.6 47.7,37.6 25,37.6 25,55.4 17.5,55.4 17.5,31.5 39.5,31.5 39.5,29 44,29 44,26.7
12V on Top Layer "12V_L01_P085" (solid, pour order 85): 5.2,33.7 6.5,33.7 6.5,22.9 4,22.9 4,19 0,19 0,44.7 5.2,44.7
3V3 on Top Layer "3V3_L01_P082" (solid, pour order 82): 3.7,18.9 0,18.9 0,15.6 3.7,15.6
12V on Top Layer "12V_L01_P090" (solid, pour order 90): 56.8,29 56.8,23.9 53.5,23.9 53.5,28.8 47.9,28.8 47.9,37.8 25.1,37.8 25.1,55.4 48,55.4 48,54 70,54 70,43 57.5,43 57.5,29
GND on Bottom Layer "GND_L02_P098" (solid, pour order 98): 0,58.1 70,58.1 70,0 0,0
HV_LOW on Bottom Layer "HV_LOW_L02_P094" (solid, pour order 94): 70,85.6 50.5,85.6 50.5,61 58,61 58,79.3 70,79.3
NetF1_2 on Bottom Layer "NETF1_2_L02_P097" (solid, pour order 97): 0,63.5 26.5,63.5 26.5,100 0,100
HV_HIGH on Bottom Layer "HV_HIGH_L02_P096" (solid, pour order 96): 70,86.9 37,86.9 37,100 70,100
3V3 on Bottom Layer "3V3_L02_P093" (solid, pour order 93): 0,14.9 10.1,14.9 10.1,17.5 16.4,17.5 16.4,21.1 8.3,21.1 8.3,18.9 0,18.9
12V on Bottom Layer "12V_L02_P095" (solid, pour order 95): 32,44.7 32,38.5 3.954,38.5 3.954,31.901 5.5,31.9 5.5,24.3 3.804,24.3 3.7,19 0,19 0,44.7

## Silkscreen, mask and mechanical layers (free items; w line width, h text height)
Top Overlay:
  lines w0.254: 0,59.4 30.1,59.4 ; 34.8,59.4 70,59.4 ; 0,0 35,0 35,30 0,30 0,0
  text "F" at 56,83.9 h6.35 r90
  text "CAUTION HV" at 57.5,81.775 h0.8 r90
  text "MODE / SELECT / 1  0" at 3.9,48.9 h0.8
Bottom Overlay:
  lines w0.254: 0,59.4 30.1,59.4 ; 34.8,59.4 70,59.4